# Altium PCB Motor_Hat.PcbDoc
Units mm, origin at the board's own origin, x right, y up, seen from the top; angles counter-clockwise.
Board outline 54 x 85.6 mm, 2 copper layers (Top Layer, Bottom Layer), stack 0.325 mm thick; 8 components, 32 nets, 116 pads, 0 vias.
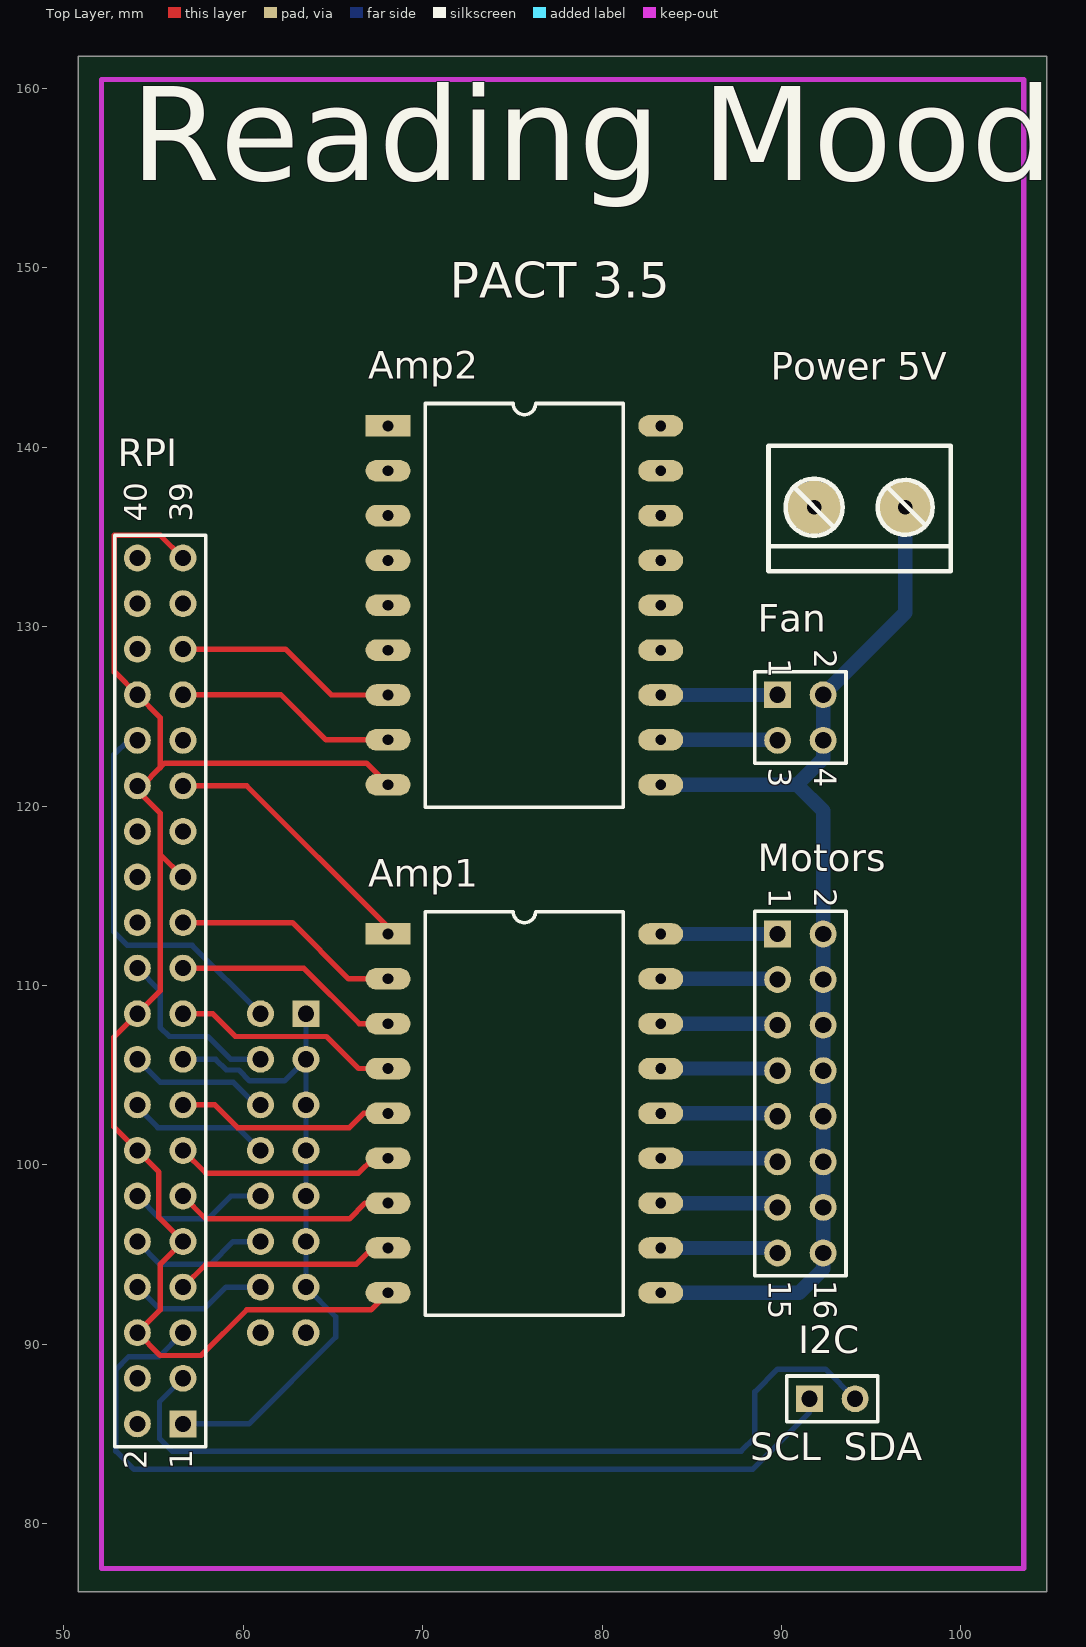
[diagram p0: Top Layer view]
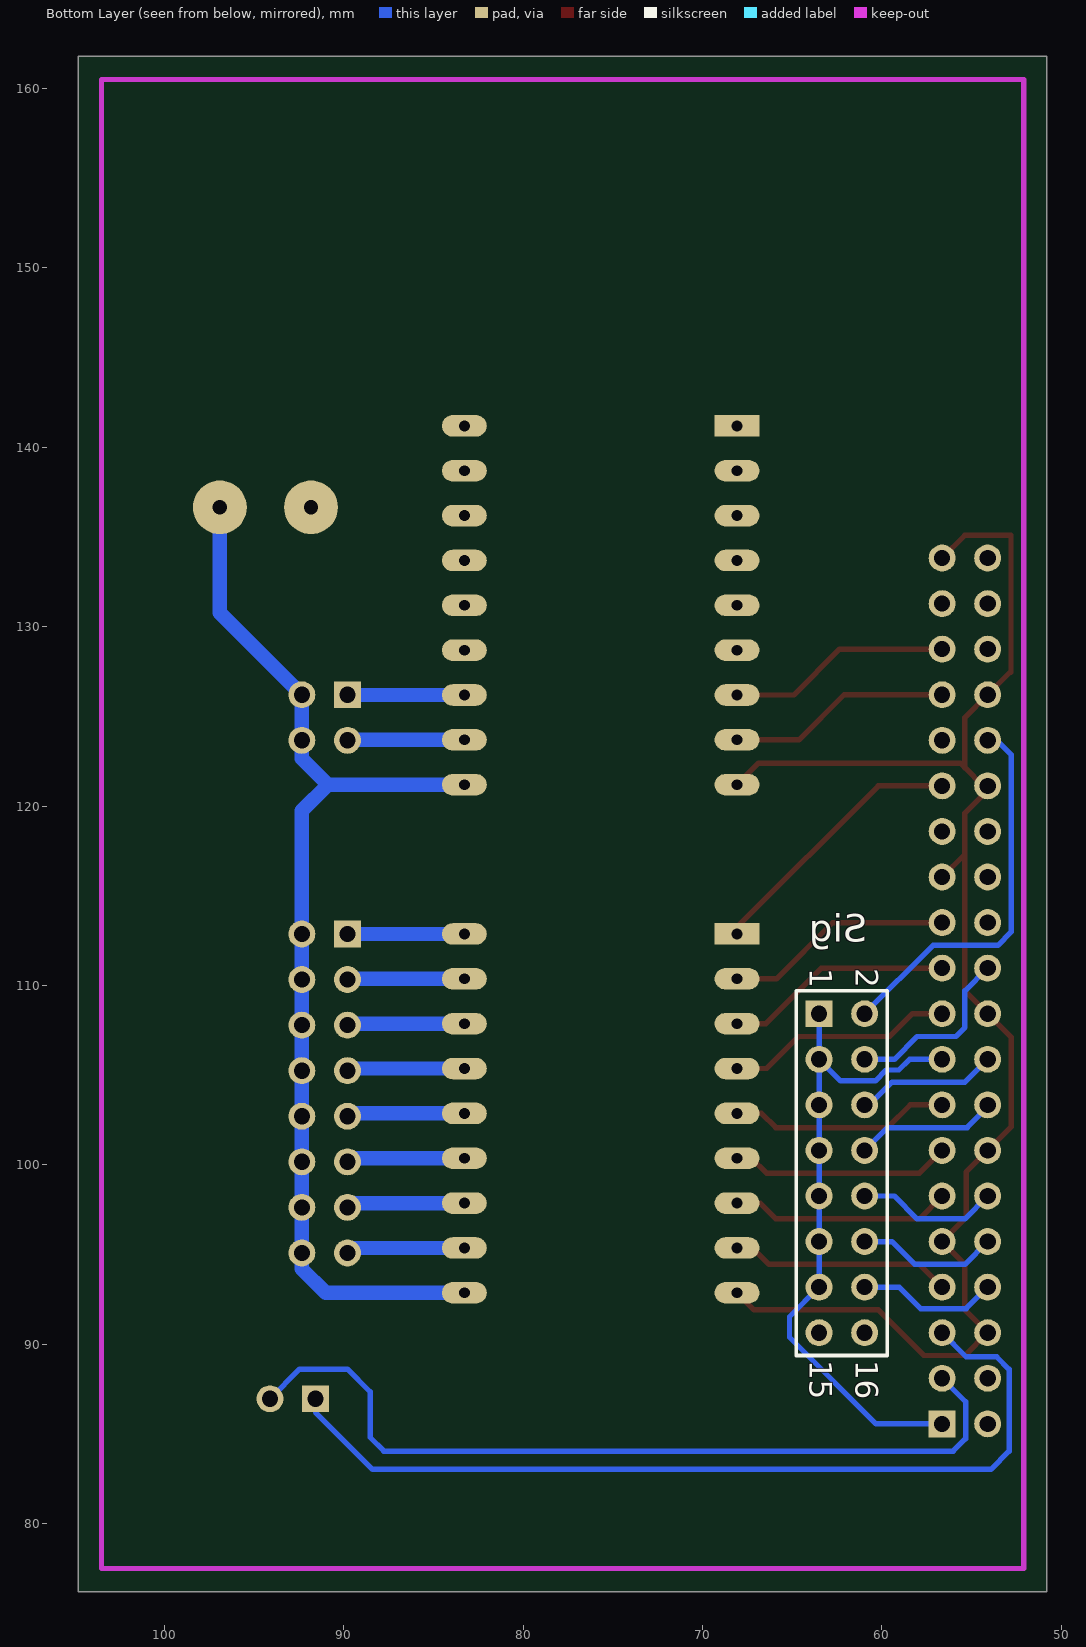
[diagram p1: Bottom Layer view, seen from below]

## Layer stack, top to bottom
Top Solder: solder mask 0.0102, Solder Resist, Dk 3.5
Top Layer: signal copper 0.0356
Dielectric 1: core 0.254, FR-4, Dk 4.2
Bottom Layer: signal copper 0.0356
Bottom Solder: solder mask 0.0102, Solder Resist, Dk 3.5

## Board outline
50.8,76.2 104.8,76.2 104.8,161.8 50.8,161.8

## Design rules (kind name [scope] priority, off if disabled: settings)
Clearance [All] p1: gap=0.3
PolygonConnect [All] p1: connectstyle=Relief reliefconductorwidth=0.254 reliefentries=4 polygonreliefangle="90 Angle" airgapwidth=0.254
RoutingVias [All] p1: holewidth=0.4 width=1.6 viastyle="Through Hole" minholewidth=0.711 minwidth=1.27 maxholewidth=0.711 maxwidth=1.27
SolderMaskExpansion [All] p1: expansion=0.102
Width [All] p1: maxlimit=0.3 minlimit=0.3 preferedwidth=0.3
30 further rules are at their usual default settings.

## Components (designator, comment, footprint, x,y, rotation, side; value= is the part's Value field where it differs from the comment)
Amp1 "SocketDip18" DIP18 68.072,112.87 r0 top
Amp2 "SocketDip18" DIP18 68.072,141.191 r0 top
Fan "Header 2X2" HDR2X2 89.789,126.205 r270 top
I2C "Header 2" HDR1X2 91.567,86.962 r0 top
Motors "Header 8X2" HDR2X8 89.789,112.87 r270 top
"Power 5V" "Bornier2" Bornier2 96.901,136.652 r180 top
RPI "Header 20X2" HDR2X20 56.642,85.565 r90 top
Sig "Header 8X2" HDR2X8 63.5,108.425 r270 bottom

## Footprints (in the part's own frame and the unit in brackets; to place one, negate y for a bottom-side part, rotate by r counter-clockwise, add the part's x,y. Pads: shape width x height; smd on the part's side, far side on the other; paste and mask are expansions set on the pad)
Bornier2 [mm]
  round 3 hole 0.8: 1(0,0) 2(5.08,0)
  silkscreen extent -2.54,-3.43 7.62,3.56
DIP18 [mm]
  rect 2.5x1.2 hole 0.6: 1(0,0)
  oval 2.5x1.2 hole 0.6: 2(0,-2.5) 3(0,-5) 4(0,-7.5) 5(0,-10) 6(0,-12.5) 7(0,-15) 8(0,-17.5) 9(0,-20) 10(15.2,-20) 11(15.2,-17.5) 12(15.2,-15) 13(15.2,-12.5) 14(15.2,-10) 15(15.2,-7.5) 16(15.2,-5) 17(15.2,-2.5) 18(15.2,0)
  silkscreen extent 2.08,-21.25 13.12,1.25
HDR1X2 [mm] "Connector; Header; 2 Position"
  rect 1.5x1.5 hole 0.9: 1(0,0)
  round 1.5 hole 0.9: 2(2.54,0)
  silkscreen extent -1.27,-1.27 3.81,1.27
HDR2X2 [mm] "Connector; Header; 2x2 Position"
  rect 1.5x1.5 hole 0.9: 1(0,0)
  round 1.5 hole 0.9: 2(0,2.54) 3(2.54,0) 4(2.54,2.54)
  silkscreen extent -1.27,-1.27 3.81,3.81
HDR2X8 [mm] "Connector; Header; 8x2 Position"
  rect 1.5x1.5 hole 0.9: 1(0,0)
  round 1.5 hole 0.9: 2(0,2.54) 3(2.54,0) 4(2.54,2.54) 5(5.08,0) 6(5.08,2.54) 7(7.62,0) 8(7.62,2.54) 9(10.16,0) 10(10.16,2.54) 11(12.7,0) 12(12.7,2.54) 13(15.24,0) 14(15.24,2.54) 15(17.78,0) 16(17.78,2.54)
  silkscreen extent -1.27,-1.27 19.05,3.81
HDR2X20 [mm] "Connector; Header; 20x2 Position"
  rect 1.5x1.5 hole 0.9: 1(0,0)
  round 1.5 hole 0.9: 2(0,2.54) 3(2.54,0) 4(2.54,2.54) 5(5.08,0) 6(5.08,2.54) 7(7.62,0) 8(7.62,2.54) 9(10.16,0) 10(10.16,2.54) 11(12.7,0) 12(12.7,2.54) 13(15.24,0) 14(15.24,2.54) 15(17.78,0) 16(17.78,2.54) 17(20.32,0) 18(20.32,2.54) 19(22.86,0) 20(22.86,2.54) 21(25.4,0) 22(25.4,2.54) 23(27.94,0) 24(27.94,2.54) 25(30.48,0) 26(30.48,2.54) 27(33.02,0) 28(33.02,2.54) 29(35.56,0) 30(35.56,2.54) 31(38.1,0) 32(38.1,2.54) 33(40.64,0) 34(40.64,2.54) 35(43.18,0) 36(43.18,2.54) 37(45.72,0) 38(45.72,2.54) 39(48.26,0) 40(48.26,2.54)
  silkscreen extent -1.27,-1.27 49.53,3.81

## Part data
Fan: "Header, 2-Pin, Dual row"
I2C: "Header, 2-Pin"
Motors Sig: "Header, 8-Pin, Dual row"
RPI: "Header, 20-Pin, Dual row"

## Nets (pads, with @x,y where several pads share a name; then routed paths per layer and width w, separated by ;. In a path a pad name is that pad's centre, name@x,y a point inside that pad or via, vN(x,y) a via of type N, cw(c..) or ccw(c..) an arc to the next point about the centre after c; other vN are vias at no path point)
3.3V: RPI.1 RPI.17 Sig.1 Sig.3 Sig.5 Sig.7 Sig.9 Sig.11 Sig.13 | length 37.1
  Bottom Layer w0.3: RPI.1 60.325,85.565 65.151,90.391 65.151,91.534 Sig.13 Sig.11 Sig.9 Sig.7 Sig.5 Sig.3 ; RPI.17 58.46,105.885 59.06,105.285 59.76,105.285 60.36,104.685 62.3,104.685 Sig.3 ; Sig.1 Sig.3
5V_Power: "Power 5V.1" Amp1.10 Amp2.10 Fan.2 Fan.4 Motors.2 Motors.4 Motors.6 Motors.8 Motors.10 Motors.12 Motors.14 Motors.16 | length 62.8
  Bottom Layer w0.8: Amp1.10 90.998,92.87 92.329,94.201 Motors.16 Motors.14 Motors.12 Motors.10 Motors.8 Motors.6 Motors.4 Motors.2 92.329,119.733 90.871,121.191 ; Amp2.10 90.871,121.191 ; 96.901,136.652 96.901,130.777 Fan.2 Fan.4 92.329,122.649 90.871,121.191
GND: Amp1.9 Amp2.9 RPI.6 RPI.9 RPI.14 RPI.20 RPI.25 RPI.30 RPI.34 RPI.39 | length 85.9
  Top Layer w0.3: RPI.25 55.372,117.315 ; RPI.39 55.372,135.095 52.806,135.095 52.806,127.461 52.846,127.461 RPI.34 55.372,124.935 55.372,122.141 ; Amp1.9 67.117,91.915 60.198,91.915 57.658,89.375 55.372,89.375 RPI.6 55.372,91.915 55.372,94.455 RPI.9 55.302,97.065 55.302,99.605 RPI.14 52.792,102.115 52.792,107.115 RPI.20 55.372,109.695 55.372,117.315 ; Amp2.9 66.868,122.395 55.626,122.395 55.372,122.141 ; 55.372,117.315 55.372,119.601 54.102,120.871 RPI.30 54.356,121.125 55.372,122.141
"GPIO2 I2C SDA": I2C.2 RPI.3 | length 47
  Bottom Layer w0.3: RPI.3 55.332,86.795 55.332,84.739 56.03,84.041 87.757,84.041 88.519,84.803 88.519,87.343 89.789,88.613 92.456,88.613 I2C.2
"GPIO3 I2C SCL": I2C.1 RPI.5 | length 50.3
  Bottom Layer w0.3: RPI.5 55.302,89.305 53.605,89.305 52.902,88.602 52.902,84.044 53.921,83.025 88.392,83.025 91.567,86.2 I2C.1
"GPIO4 D1": Amp1.8 RPI.7 | length 12.3
  Top Layer w0.3: RPI.7 57.912,94.455 66.294,94.455 67.209,95.37 Amp1.8
"GPIO5 D8": Amp1.1 RPI.29 | length 15.1
  Top Layer w0.3: RPI.29 60.198,121.125 68.072,113.251 Amp1.1
"GPIO6 V9": Amp2.8 RPI.33 | length 12.5
  Top Layer w0.3: RPI.33 62.103,126.205 64.617,123.691 Amp2.8
"GPIO9 D6": Amp1.3 RPI.21 | length 12.7
  Top Layer w0.3: RPI.21 63.373,110.965 66.468,107.87 Amp1.3
"GPIO10 D5": Amp1.4 RPI.19 | length 12.7
  Top Layer w0.3: RPI.19 58.293,108.425 59.563,107.155 64.643,107.155 66.428,105.37 Amp1.4
"GPIO11 D7": Amp1.2 RPI.23 | length 12.7
  Top Layer w0.3: RPI.23 62.738,113.505 65.873,110.37 Amp1.2
"GPIO12 IN7": RPI.32 Sig.2 | length 21.6
  Bottom Layer w0.3: RPI.32 53.594,123.665 52.792,122.863 52.792,112.983 53.54,112.235 57.15,112.235 Sig.2
"GPIO13 V10": Amp2.7 RPI.35 | length 12.5
  Top Layer w0.3: RPI.35 62.357,128.745 64.911,126.191 Amp2.7
"GPIO14 IN1": RPI.8 Sig.14 | length 7.9
  Bottom Layer w0.3: RPI.8 55.302,91.985 57.842,91.985 59.042,93.185 Sig.14
"GPIO15 IN2": RPI.10 Sig.12 | length 7.9
  Bottom Layer w0.3: RPI.10 55.372,94.455 58.166,94.455 59.436,95.725 Sig.12
"GPIO17 D2": Amp1.7 RPI.11 | length 12.3
  Top Layer w0.3: RPI.11 57.912,96.995 65.913,96.995 66.788,97.87 Amp1.7
"GPIO18 IN3": RPI.12 Sig.10 | length 7.9
  Bottom Layer w0.3: RPI.12 55.372,96.995 58.039,96.995 59.309,98.265 Sig.10
"GPIO22 D4": Amp1.5 RPI.15 | length 12.3
  Top Layer w0.3: RPI.15 58.42,103.345 59.69,102.075 65.913,102.075 66.708,102.87 Amp1.5
"GPIO23 IN4": RPI.16 Sig.8 | length 8
  Bottom Layer w0.3: RPI.16 54.102,103.218 55.245,102.075 59.69,102.075 Sig.8
"GPIO24 IN5": RPI.18 Sig.6 | length 7.9
  Bottom Layer w0.3: RPI.18 55.372,104.615 59.436,104.615 60.706,103.345 Sig.6
"GPIO25 IN6": RPI.22 Sig.4 | length 10.7
  Top Layer w0.3: RPI.22 RPI.22@54.61,110.965
  Bottom Layer w0.3: RPI.22 55.372,109.695 55.372,107.663 55.88,107.155 58.039,107.155 59.309,105.885 Sig.4
"GPIO27 D3": Amp1.6 RPI.13 | length 12.3
  Top Layer w0.3: RPI.13 57.912,99.535 66.421,99.535 67.256,100.37 Amp1.6
NetAmp1_11: Amp1.11 Motors.15 | length 6.6
  Bottom Layer w0.3: Motors.15@89.509,95.37 Motors.15
  Bottom Layer w0.8: Amp1.11 Motors.15@89.509,95.37
NetAmp1_12: Amp1.12 Motors.13 | length 6.6
  Bottom Layer w0.3: Motors.13@89.549,97.87 Motors.13
  Bottom Layer w0.8: Amp1.12 Motors.13@89.549,97.87
NetAmp1_13: Amp1.13 Motors.11 | length 6.6
  Bottom Layer w0.3: Motors.11@89.589,100.37 Motors.11
  Bottom Layer w0.8: Amp1.13 Motors.11@89.589,100.37
NetAmp1_14: Amp1.14 Motors.9 | length 6.6
  Bottom Layer w0.3: Motors.9@89.629,102.87 Motors.9
  Bottom Layer w0.8: Amp1.14 Motors.9@89.629,102.87
NetAmp1_15: Amp1.15 Motors.7 | length 6.6
  Bottom Layer w0.3: Motors.7@89.669,105.37 Motors.7
  Bottom Layer w0.8: Amp1.15 Motors.7@89.669,105.37
NetAmp1_16: Amp1.16 Motors.5 | length 6.4
  Bottom Layer w0.8: Amp1.16 Motors.5@89.709,107.87
NetAmp1_17: Amp1.17 Motors.3 | length 6.5
  Bottom Layer w0.8: Amp1.17 Motors.3@89.749,110.37
NetAmp1_18: Amp1.18 Motors.1 | length 6.5
  Bottom Layer w0.8: Amp1.18 Motors.1
NetAmp2_11: Amp2.11 Fan.3 | length 6.5
  Bottom Layer w0.3: Fan.3@89.763,123.691 Fan.3
  Bottom Layer w0.8: Amp2.11 Fan.3@89.763,123.691
NetAmp2_12: Amp2.12 Fan.1 | length 6.5
  Bottom Layer w0.8: Amp2.12 Fan.1@89.775,126.191
pads on no net: "Power 5V.2" Amp2.1 Amp2.2 Amp2.3 Amp2.4 Amp2.5 Amp2.6 Amp2.13 Amp2.14 Amp2.15 Amp2.16 Amp2.17 Amp2.18 RPI.2 RPI.4 RPI.24 RPI.26 RPI.27 RPI.28 RPI.31 RPI.36 RPI.37 RPI.38 RPI.40 Sig.15 Sig.16

## Keep-outs
Keep-Out Layer:
  lines w0.3: 52.1,77.5 103.5,77.5 103.5,160.5 52.1,160.5 52.1,77.5

## Silkscreen, mask and mechanical layers (free items; w line width, h text height)
Top Overlay:
  text "Reading Mood" at 53.721,153.162 h9
  text "PACT 3.5" at 71.501,148.336 h2
  text "SCL" at 88.265,83.533 h1.52
  text "SDA" at 93.472,83.533 h1.52

## Text inside footprints (layer, text, board x,y; h text height)
Fan: Top Overlay "3" at 89.281,122.141 h1.27 r270; Top Overlay "4" at 91.821,122.141 h1.27 r270; Top Overlay "2" at 91.821,128.745 h1.27 r270; Top Overlay "1" at 89.281,128.237 h1.27 r270
Motors: Top Overlay "16" at 91.821,93.566 h1.27 r270; Top Overlay "15" at 89.281,93.566 h1.27 r270; Top Overlay "1" at 89.281,115.41 h1.27 r270; Top Overlay "2" at 91.821,115.41 h1.27 r270
RPI: Top Overlay "39" at 57.15,135.857 h1.27 r90; Top Overlay "40" at 54.61,135.857 h1.27 r90; Top Overlay "2" at 54.61,83.025 h1.27 r90; Top Overlay "1" at 57.15,83.025 h1.27 r90
Sig: Bottom Overlay "16" at 61.468,89.121 h1.27 r90; Bottom Overlay "15" at 64.008,89.121 h1.27 r90; Bottom Overlay "1" at 64.008,110.965 h1.27 r90; Bottom Overlay "2" at 61.468,110.965 h1.27 r90